# EAGLE board stereo_link (EAGLE 7.3.0)
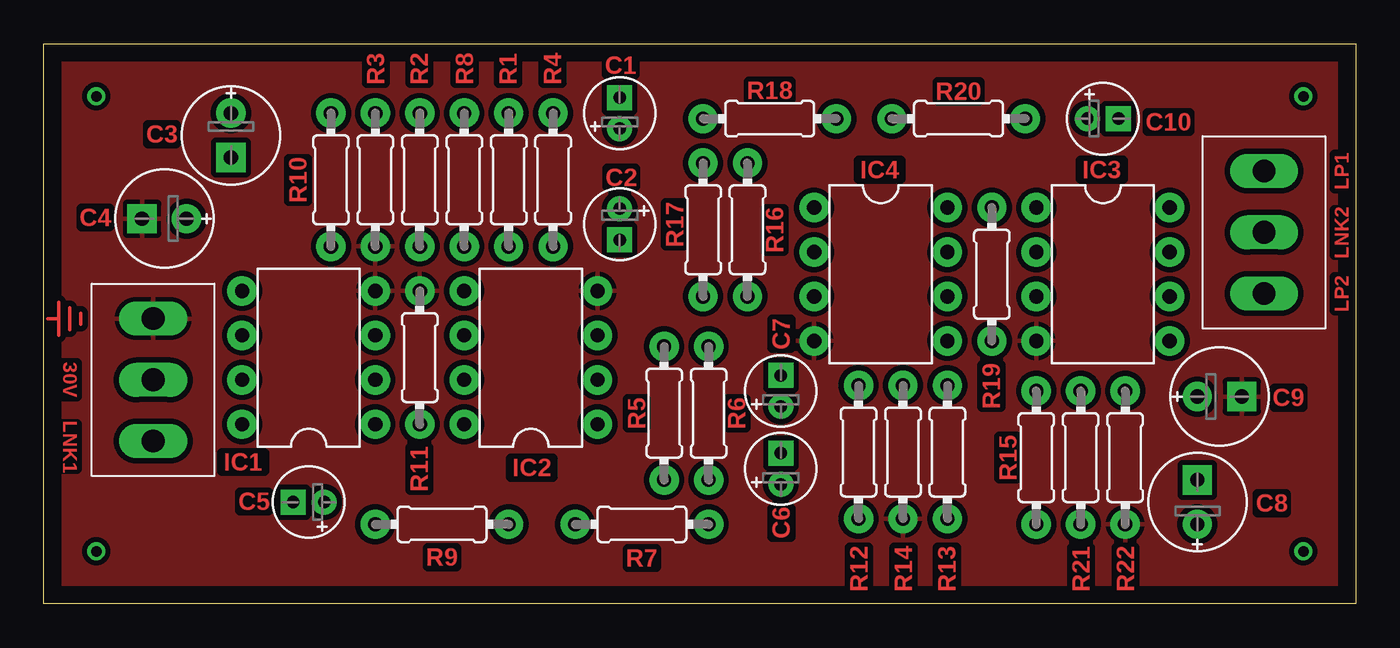
[diagram p0: board, top side]
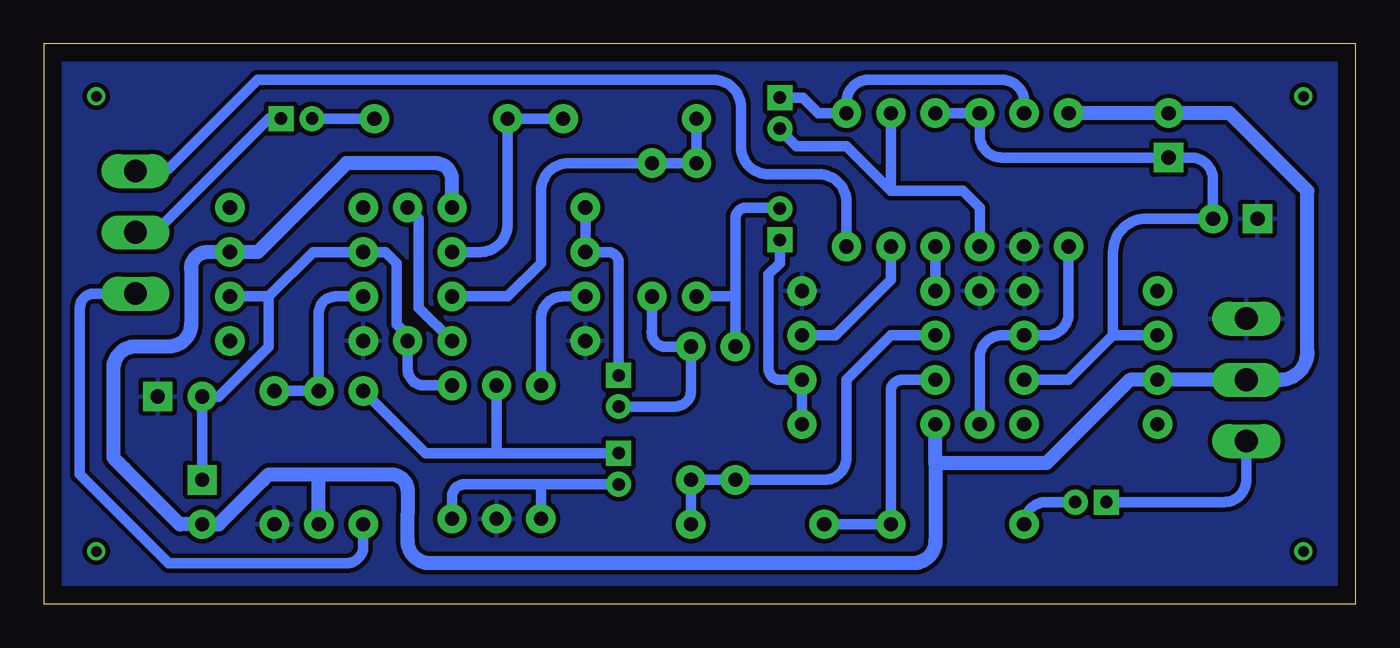
[diagram p1: board, bottom side, seen from below]

Size 75 x 32 mm. Coordinates in mm from the lower left corner, seen from the top.
Outline: 0,32 75,32 75,0 0,0 0,32
Copper layers (1*16): Top 0.035mm / dielectric 1.5mm / Bottom 0.035mm
Design rules "default": minimum track width 10mil, minimum drill 24mil, track to track 8mil, track to pad 8mil, pad to pad 8mil, via to via 8mil, smd to smd 8mil, copper to edge 40mil, drill to drill 8mil, minimum pad ring 10mil, minimum via ring 8mil, stop-mask expansion 4mil, vias tented up to drill 0mil, thermal gap 10mil

## Footprints (pad centres in the part's own frame; a part is rotated, then mirrored left to right if it is on the bottom)
E1,8-4 = drill 0.711 pad 1.422: + -0.889,0 | drill 0.711 pad 1.422 square: - 0.889,0
E2,5-6E = drill 0.813 pad 1.676: + -1.27,0 | drill 0.813 pad 1.676 square: - 1.27,0
DIL08 = drill 0.813 pad 1.676: 1 -3.81,-3.81; 2 -1.27,-3.81; 3 1.27,-3.81; 4 3.81,-3.81; 5 3.81,3.81; 6 1.27,3.81; 7 -1.27,3.81; 8 -3.81,3.81
0204/7 = drill 0.813 pad 1.676: 1 -3.81,0; 2 3.81,0
3.5MM = drill 1.3 long: P$1 -3.5,0; P$2 0,0; P$3 3.5,0

## Placement (x,y rotation side)
C1  [E1,8-4]  32.92,28.04 90 top
C2  [E1,8-4]  32.92,21.68 270 top
C3  47uf  [E2,5-6E]  10.7,26.77 270 top
C4  47uf  [E2,5-6E]  6.89,22 180 top
C5  [E1,8-4]  15.14,5.81 180 top
C6  [E1,8-4]  42.13,7.71 90 top
C7  [E1,8-4]  42.13,12.16 90 top
C8  47uf  [E2,5-6E]  65.94,5.81 90 top
C9  47uf  [E2,5-6E]  67.22,11.84 0 top
C10  [E1,8-4]  60.55,27.72 0 top
IC1  TL071P  [DIL08]  15.14,14.06 90 top
IC2  TL072P  [DIL08]  27.84,14.06 90 top
IC3  TL071P  [DIL08]  60.55,18.83 270 top
IC4  TL072P  [DIL08]  47.85,18.83 270 top
R1  [0204/7]  26.57,24.23 90 top
R2  [0204/7]  21.5,24.23 90 top
R3  [0204/7]  18.95,24.23 270 top
R4  [0204/7]  29.11,24.23 90 top
R5  [0204/7]  35.47,10.89 270 top
R6  [0204/7]  38.01,10.89 270 top
R7  [0204/7]  34.2,4.54 180 top
R8  [0204/7]  24.04,24.23 270 top
R9  [0204/7]  22.77,4.54 0 top
R10  [0204/7]  16.41,24.23 270 top
R11  [0204/7]  21.5,14.06 90 top
R12  [0204/7]  46.58,8.67 270 top
R13  [0204/7]  51.66,8.67 90 top
R14  [0204/7]  49.12,8.67 270 top
R15  [0204/7]  56.74,8.35 90 top
R16  [0204/7]  40.23,21.37 90 top
R17  [0204/7]  37.69,21.37 90 top
R18  [0204/7]  41.5,27.72 0 top
R19  [0204/7]  54.2,18.83 90 top
R20  [0204/7]  52.29,27.72 180 top
R21  [0204/7]  59.28,8.35 90 top
R22  [0204/7]  61.82,8.35 270 top
X1  22-23-20313.5  [3.5MM]  69.75,21.23 90 top
X2  22-23-20313.5  [3.5MM]  6.26,12.79 90 top

## Library data of the parts
C1-C10 R1-R22 = rcl
IC1-IC4 = linear
X1 X2 = con-molex

## Nets
+24V: C3.+ C8.+ IC1.7 IC2.8 IC3.7 IC4.8 R10.1 R21.1 X2.P$2
GND: C4.- C9.- IC1.4 IC2.4 IC3.4 IC4.4 R3.2 R11.2 R14.2 R22.2 X2.P$3
N$1: C1.- R3.1 R4.2
N$2: C1.+ R1.2 R2.1
N$3: C6.- R14.1 R15.2
N$4: IC2.3 R1.1
N$5: C2.- IC2.1 IC2.2
N$6: R15.1 X1.P$1
N$7: C7.+ R6.1 R16.1
N$8: IC2.6 R5.2 R6.2 R7.1
N$9: IC2.5 R8.2
N$10: IC2.7 R7.2 R9.2
N$11: C5.+ R9.1
N$12: C5.- X2.P$1
N$13: IC1.3 R10.2 R11.1
N$14: C10.- X1.P$2
N$15: C6.+ R12.2 R13.1
N$16: IC4.3 R12.1
N$17: C3.- C4.+ IC1.2 IC1.6 R2.2 R8.1
N$18: C7.- IC4.1 IC4.2
N$19: R4.1 X1.P$3
N$20: C2.+ R5.1 R17.1
N$21: IC4.6 R16.2 R17.2 R18.1
N$22: IC4.5 R19.2
N$23: IC4.7 R18.2 R20.2
N$24: C10.+ R20.1
N$26: IC3.3 R21.2 R22.1
N$27: C8.- C9.+ IC3.2 IC3.6 R13.2 R19.1

## Tracks (layer width: path | path; a pad name or v marks a point on that pad's centre or on a via)
+24V
  Bottom 0.813: R10.1 C3.+ 7.21,28.04 2.76,23.59 2.76,14.38 arc90 4.35,12.79 X2.P$2 IC1.7 12.92,12.79 17.68,8.03 24.04,8.03 | IC4.8 51.66,23.59 51.66,24.23 arc-90 52.61,25.18 57.69,25.18 62.77,20.1 | 62.77,20.1 IC3.7 | 24.04,8.03 24.04,8.67 IC2.8 | 70.39,7.71 67.22,4.54 C8.+ 64.99,4.54 62.45,7.08 62.14,7.4 59.28,7.4 | 70.71,8.03 70.39,7.71 | 24.04,8.03 24.04,3.59 arc90 25.3,2.32 52.93,2.32 arc90 54.2,3.59 54.2,5.17 54.2,6.45 arc-90 55.15,7.4 58.33,7.4 59.28,7.4 | 62.77,20.1 65.63,20.1 arc-90 66.58,19.14 66.58,15.97 arc90 67.85,14.7 69.75,14.7 arc-90 71.03,13.43 71.03,8.35 70.39,7.71 | R21.1 59.28,7.4
GND
  pour Bottom (isolate 0.254): 0,32 75,32 75,0 0,0
  pour Top (isolate 0.305): 0,32 75,32 75,0 0,0
N$1
  Bottom 0.61: R3.1 18.95,28.67 arc-90 20.23,29.94 27.84,29.94 arc-90 29.11,28.67 R4.2 30.7,28.04 31.59,28.92 C1.-
N$2
  Bottom 0.61: C1.+ 32.92,27.08 31.97,26.13 29.11,26.13 26.57,23.59 | R1.2 26.57,23.59 | 26.57,23.59 22.45,23.59 21.5,22.64 R2.1
N$3
  Bottom 0.61: C6.- 49.12,8.6 | 49.12,8.6 53.18,8.6 R15.2 | R14.1 49.12,8.6
N$4
  Bottom 0.61: R1.1 26.57,18.51 29.75,15.34 IC2.3
N$5
  Bottom 0.61: IC2.1 IC2.2 32.92,12.79 arc90 33.56,13.43 33.56,18.19 33.56,18.83 32.92,19.46 C2.-
N$6
  Bottom 0.61: R15.1 56.74,3.27 arc90 57.69,2.32 59.59,2.32 66.9,2.32 67.22,2.32 67.85,2.32 72.93,7.4 72.93,16.92 arc90 72.13,17.73 X1.P$1
N$7
  Bottom 0.61: R16.1 40.23,15.65 arc-90 39.59,14.7 R6.1 38.01,12.16 arc90 38.89,11.27 C7.+
N$8
  Bottom 0.61: R7.1 R6.2 R5.2 30.38,7.08 arc-90 29.11,8.35 29.11,12.79 26.57,15.34 IC2.6
N$9
  Bottom 0.61: IC2.5 R8.2
N$10
  Bottom 0.61: R7.2 R9.2 26.57,12.16 arc90 25.94,12.79 IC2.7
N$11
  Bottom 0.61: C5.+ 17.68,5.81 arc-90 R9.1
N$12
  Bottom 0.61: X2.P$1 6.26,7.08 arc90 7.53,5.81 C5.-
N$13
  Bottom 0.61: R10.2 16.41,16.61 arc90 17.68,15.34 IC1.3 20.23,15.34 arc-90 21.5,14.06 R11.1
N$14
  Bottom 0.61: C10.- 62.14,27.72 68.48,21.37 69.61,21.37 X1.P$2
N$15
  Bottom 0.61: C6.+ 46.9,6.83 | 46.9,6.83 50.96,6.83 arc-90 51.66,6.13 R13.1 | R12.2 46.58,6.51 arc-90 46.9,6.83
N$16
  Bottom 0.61: IC4.3 45.31,17.56 arc-90 46.58,16.29 R12.1
N$17
  Bottom 0.61: 13.88,15.34 13.88,20.1 arc90 11.97,22 C4.+ 8.16,24.23 arc-90 9.43,25.5 C3.- 20.23,25.5 arc90 21.5,26.77 R2.2 R8.1 | 13.88,15.34 IC1.6 | IC1.2 16.41,12.79 13.88,15.34
N$18
  Bottom 0.61: IC4.1 IC4.2 42.77,20.1 arc90 42.13,19.46 C7.-
N$19
  Bottom 0.61: R4.1 29.11,22.95 arc-90 30.7,24.54 33.56,24.54 arc90 35.15,26.13 35.15,28.35 arc-90 36.73,29.94 62.14,29.94 62.77,29.94 67.85,24.86 69.62,24.86 X1.P$3
N$20
  Bottom 0.61: R5.1 35.47,17.88 | 35.47,17.88 35.47,22 arc90 34.83,22.64 32.99,22.64 arc90 C2.+ | R17.1 35.78,17.56 arc-90 35.47,17.88
N$21
  Bottom 0.61: R18.1 R17.2 R16.2 44.99,25.18 arc-90 46.58,23.59 46.58,19.46 48.48,17.56 IC4.6
N$22
  Bottom 0.61: IC4.5 53.56,16.92 53.56,22 R19.2
N$23
  Bottom 0.61: R18.2 R20.2 48.48,21.68 arc90 50.07,20.1 IC4.7
N$24
  Bottom 0.61: C10.+ R20.1
N$25  (via drill 0.6)
  other vias: 3,29
N$26
  Bottom 0.61: IC3.3 58.33,17.56 arc-90 59.28,16.61 R21.2 R22.1
N$27
  Bottom 0.61: 62.14,17.56 59.59,20.1 IC3.2 55.47,20.1 54.83,19.46 54.83,15.97 54.2,15.34 R19.1 54.2,13.43 arc-90 53.24,12.48 R13.2 | 62.14,17.56 IC3.6 | C8.- 65.94,9.62 C9.+ 64.99,11.84 62.14,14.7 62.14,17.56
N$28  (via drill 0.6)
  other vias: 72,29
N$29  (via drill 0.6)
  other vias: 72,3
N$30  (via drill 0.6)
  other vias: 3,3
N$31
  Top 0.2: 2.13,16.29 2.13,16.61 2.13,15.97
N$32
  Top 0.2: 1.49,16.92 1.49,15.65
N$33
  Top 0.2: 0.86,17.24 0.86,16.29 | 0.86,16.29 0.86,15.34 | 0.22,16.29 0.86,16.29

## Text on the board
Top: LP1 | LNK2 | LP2 | 30V | LNK1